# Altium PCB CME-M5_DevBrd.PcbDoc
Units mil, origin at the board's own origin, x right, y up, seen from the top; angles counter-clockwise.
Board outline 3741 x 2048 mil, 2 copper layers (Top Layer, Bottom Layer); 58 components, 120 nets, 399 pads, 181 vias.
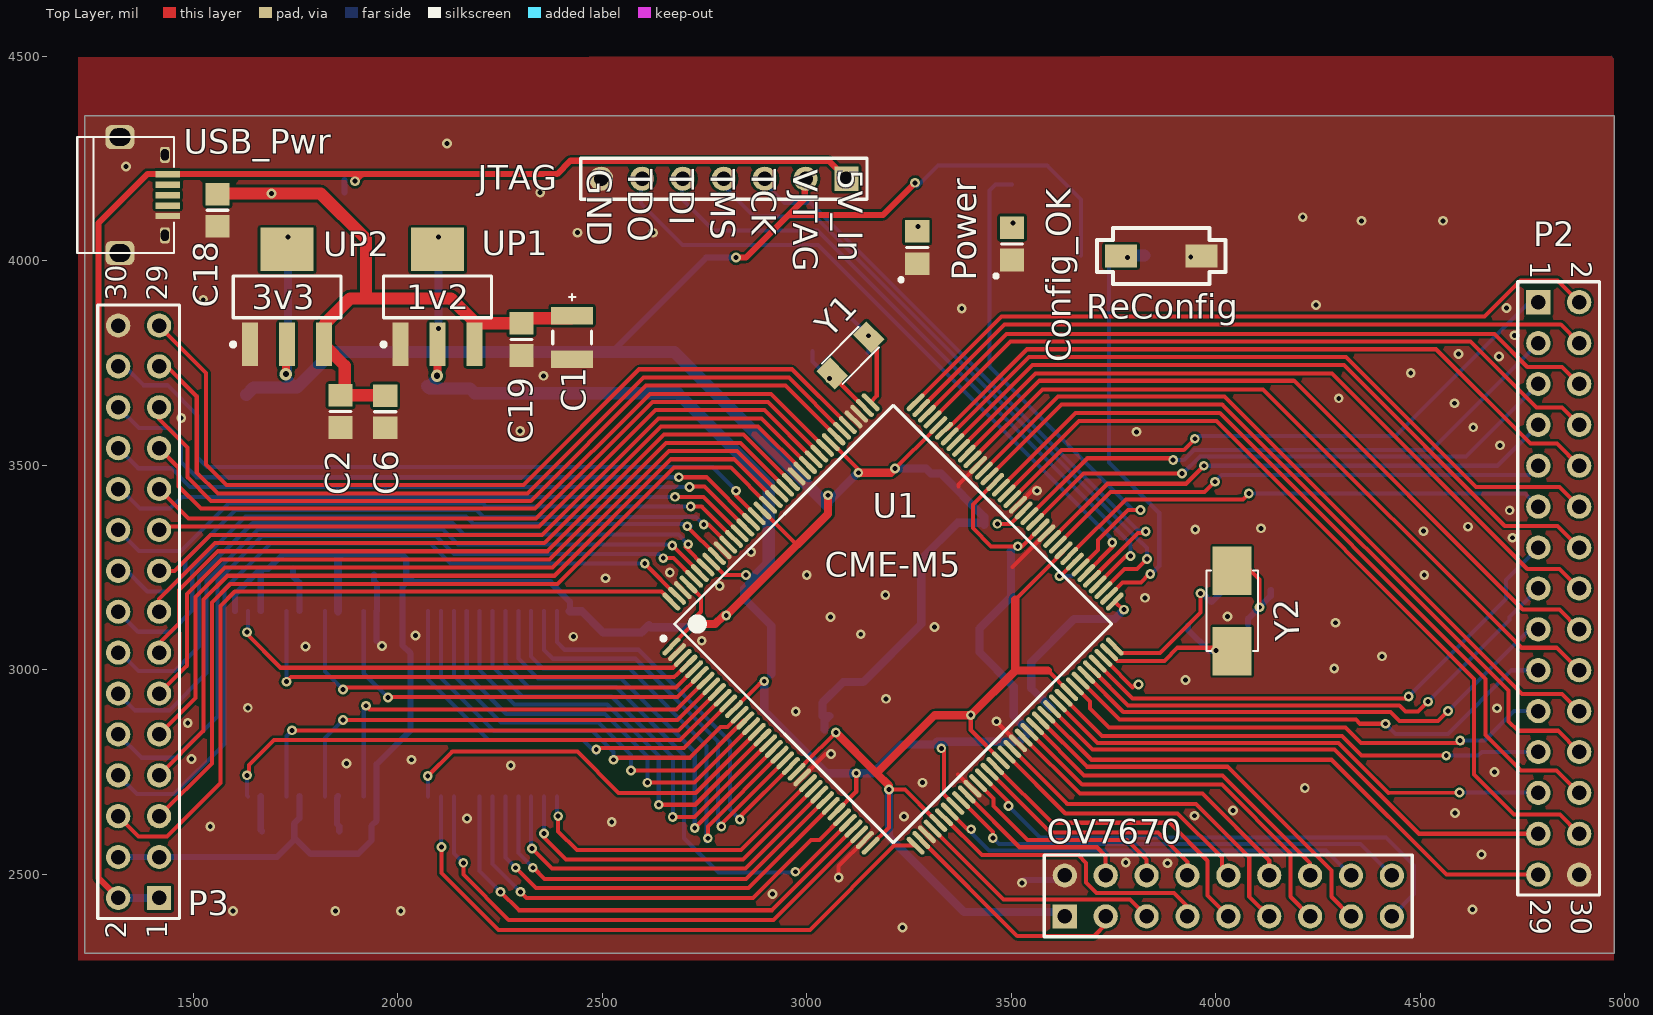
[diagram p0: Top Layer view]
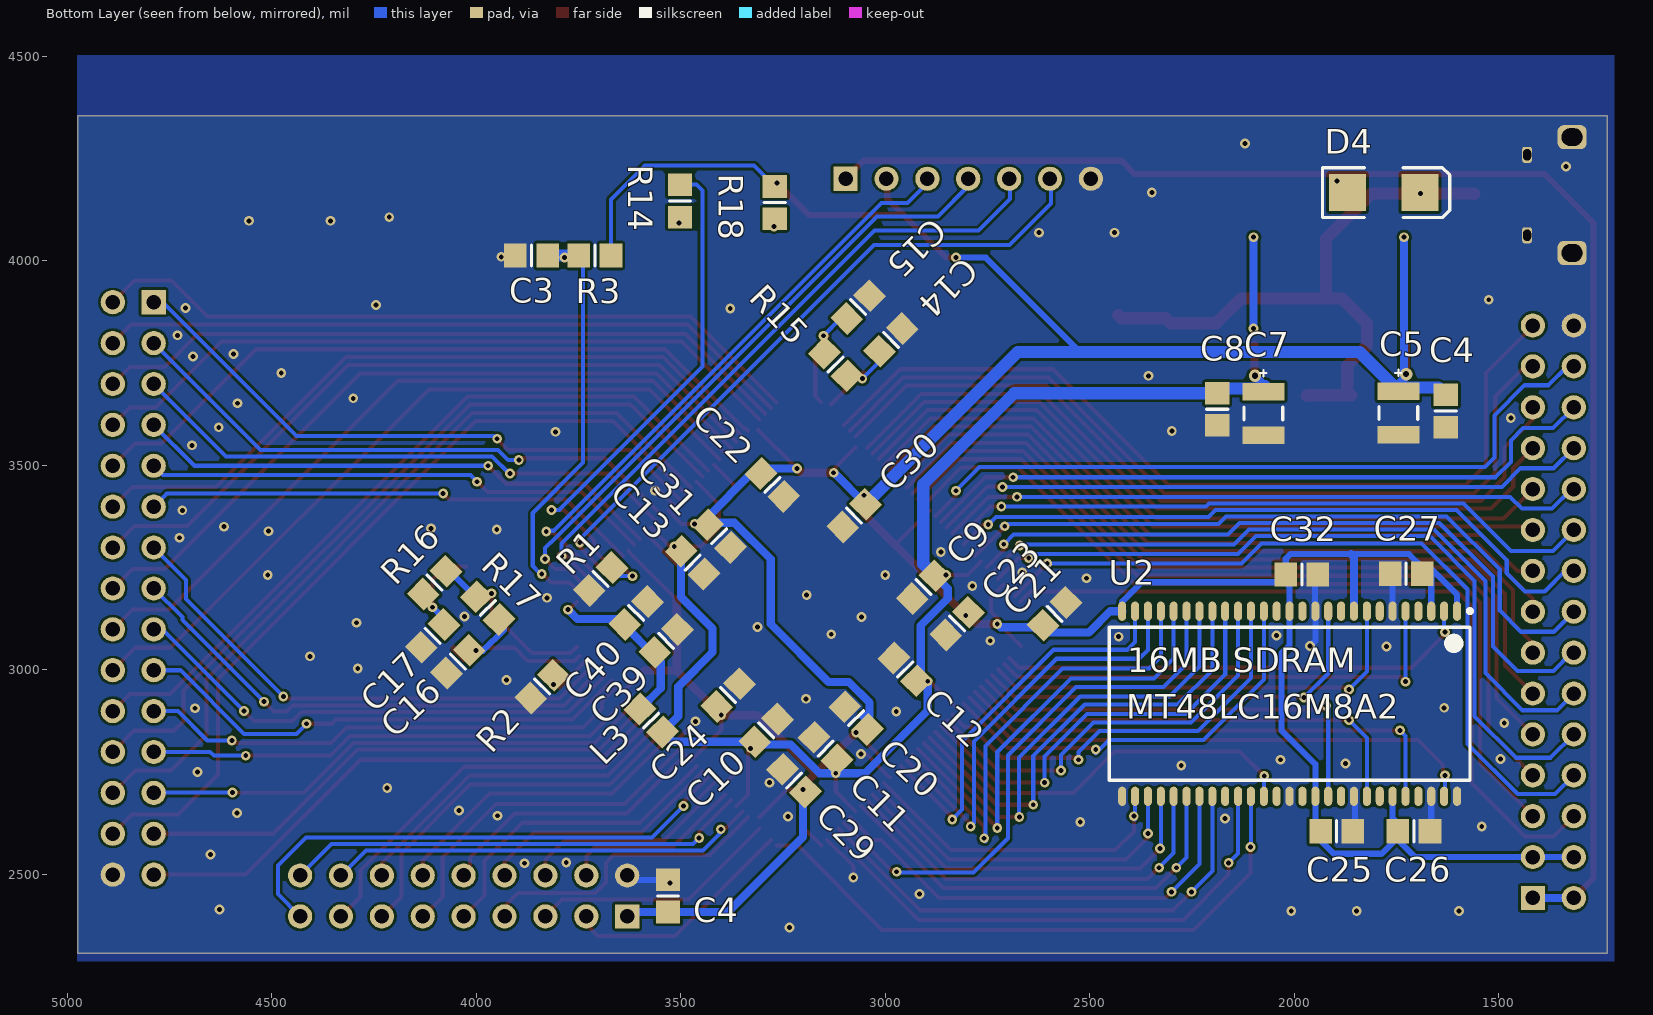
[diagram p1: Bottom Layer view, seen from below]

## Layer stack, top to bottom
Top Solder: solder mask 0.4, Solder Resist, Dk 3.5
Top Layer: signal copper 1.4
Dielectric 1: dielectric 12.6, FR-4, Dk 4.8
Bottom Layer: signal copper 1.4
Bottom Solder: solder mask 0.4, Solder Resist, Dk 3.5

## Board outline
1234,2307 1234,4355 4975,4355 4975,2307

## Design rules (kind name [scope] priority, off if disabled: settings)
Clearance [All] p1: gap=6 ignorepadtopadclearanceinfootprint=FALSE except(0: Arc-Hole Track-Hole SMDPad-Hole THPad-Hole Via-Hole Fill-Hole Poly-Hole Region-Hole Text-Hole)
HoleToHoleClearance [All] p1: gap=0 allowstackedmicrovias=TRUE
MinimumSolderMaskSliver [All] p1: minsoldermaskwidth=0
PolygonConnect [All] p1: connectstyle=Direct reliefconductorwidth=10 reliefentries=4 polygonreliefangle="90 Angle" airgapwidth=10
RoutingVias [All] p1: holewidth=28 width=50 viastyle="Through Hole" minholewidth=28 minwidth=50 maxholewidth=28 maxwidth=50
SilkToSilkClearance [All] p1: silktosilkclearance=0
SilkToSolderMaskClearance [IsPad] p1: minsilkscreentomaskgap=0 clearancetoexposedcopper=TRUE
SolderMaskExpansion [All] p1: expansion=4
Width [All] p1: maxlimit=50 minlimit=10 preferedwidth=10
26 further rules are at their usual default settings.

## Classes and differential pairs
component class CME-M5_DevBrd: C4 OV7670 P2 P3 R1 U1 U2
component class Block_Pwr&Dbg: C1 C2 C3 C4 C5 C6 C7 C8 C9 C10 C11 C12 C13 C14 C15 C16 C17 C18 C19 C20 C21 C22 C23 C24 C25 C26 C27 C29 C30 C31 C32 C39 C40 Config_OK D4 JTAG L3 Power R2 R3 R14 R15 R16 R17 R18 ReConfig UP1 UP2 USB_Pwr Y1 Y2

## Components (designator, comment, footprint, x,y, rotation, side; value= is the part's Value field where it differs from the comment)
C1 "Cap Pol3" TanCap-1210 2426,3813 r270 top value=47uF
C2 "Cap" 6-0805_M 1860,3632 r90 top value=100nF
C3 "Cap" 6-0805_M 3865,4013.26 r180 bottom value=1uF
C4 "Cap" 6-0805_M 1629,3633 r90 bottom value=100nF
C4 "Cap" 6-0805_M 3531,2447 r270 bottom value=100nF
C5 "Cap Pol3" TanCap-1210 1745,3628 r270 bottom value=47uF
C6 "Cap" 6-0805_M 1969,3631 r90 top value=100nF
C7 "Cap Pol3" TanCap-1210 2075,3627 r270 bottom value=47uF
C8 "Cap" 6-0805_M 2188,3637 r90 bottom value=100nF
C9 "Cap" 6-0805_M 2906,3202 r135 bottom value=100nF
C10 "Cap" 6-0805_M 3291,2852 r315 bottom value=100nF
C11 "Cap" 6-0805_M 3146,2807 r225 bottom value=100nF
C12 "Cap" 6-0805_M 2951,3001 r225 bottom value=100nF
C13 "Cap" 6-0805_M 3471,3262 r45 bottom value=100nF
C14 "Cap" 6-0805_M 2986,3807 r315 bottom value=15pF
C15 "Cap" 6-0805_M 3066,3887 r315 bottom value=15pF
C16 "Cap" 6-0805_M 4045,3020 r135 bottom value=22pF
C17 "Cap" 6-0805_M 4107,3083 r135 bottom value=22pF
C18 "Cap" 6-0805_M 1559,4124 r90 top value=10uF
C19 "Cap" 6-0805_M 2302,3808 r90 top value=10uF
C20 "Cap" 6-0805_M 3071,2882 r225 bottom value=100nF
C21 "Cap" 6-0805_M 2586,3137.04 r315 bottom value=100nF
C22 "Cap" 6-0805_M 3276,3452 r45 bottom value=100nF
C23 "Cap" 6-0805_M 2824,3113 r135 bottom value=100nF
C24 "Cap" 6-0805_M 3384,2938 r315 bottom value=100nF
C25 "Cap" 6-0805_M 1896,2605 r0 bottom value=100nF
C26 "Cap" 6-0805_M 1707,2605 r0 bottom value=100nF
C27 "Cap" 6-0805_M 1726,3235 r180 bottom value=100nF
C29 "Cap" 6-0805_M 3223,2729 r225 bottom value=10uF
C30 "Cap" 6-0805_M 3076,3377 r135 bottom value=10uF
C31 "Cap" 6-0805_M 3406,3327 r45 bottom value=10uF
C32 "Cap" 6-0805_M 1981,3233 r0 bottom value=10uF
C39 "Cap" 6-0805_M 3536,3071 r315 bottom value=100nF
C40 "Cap" 6-0805_M 3609,3139 r315 bottom value=10uF
Config_OK "LED2" 6-0805_Diode 3502,4041.63 r270 top
D4 "SS34" SMB 1781,4167 r180 bottom
JTAG "P4" HDR1X7 3097,4201 r180 top
L3 "Inductor" 6-0805_M 3572.21,2876.07 r45 bottom value=300R@100M
OV7670 "OV7670" HDR2X9 3631,2397 r0 top
P2 "Header 15X2" HDR2X15 4789,3899 r270 top
P3 "Header 15X2" HDR2X15 1416,2442 r90 top locked
Power "LED2" 6-0805_Diode 3270,4032.63 r270 top
R1 "Res3" 6-0805_M 3696,3222 r135 bottom value=1K
R2 "Res3" 6-0805_M 3839,2959 r135 bottom value=1K
R3 "Res3" 6-0805_M 3710,4013.26 r180 bottom value=10k
R14 "Res1" 6-0805_M 3502,4146.63 r270 bottom value=330
R15 "Res3" 6-0805_M 3121,3747 r225 bottom value=15M
R16 "Res3" 6-0805_M 4102,3213 r315 bottom value=330
R17 "Res3" 6-0805_M 3972,3151 r45 bottom value=1M
R18 "Res1" 6-0805_M 3270,4142.63 r270 bottom value=330
ReConfig "S2" Switch_SMT-022S-H2.5 3867,4012 r0 top
U1 "CME-M5-QFP144" QFP144N-50P2200X2200X160 3211,3112 r45 top locked
U2 "MT48LC16M8A2" TSOP54-80P1180X100- 2011,2917 r270 bottom locked
UP1 "LM1117-1.2" SOT223_M 2097,3912 r90 top
UP2 "LM1117-3.3" SOT223_M 1729,3912 r90 top
USB_Pwr "Header 5" MicroUSB 1341.5,4173.35 r90 top
Y1 "32.768k" XTAL-3215 3107,3769 r225 top
Y2 "20M" XTAL-5032 4040,3144 r90 top

## Footprints (in the part's own frame and the unit in brackets; to place one, negate y for a bottom-side part, rotate by r counter-clockwise, add the part's x,y. Pads: shape width x height; smd on the part's side, far side on the other; paste and mask are expansions set on the pad)
6-0805_Diode [mm] "Chip Resistor, Body 2.0x1.2mm, IPC Low Density"
  rect 1.4x1.5 smd: 1(-1,0) 2(1,0)
  silkscreen extent 0,-1.1 2.1,0.65, body extent -1.07,-0.7 1.07,0.7, height 0.7
6-0805_M [mm] "Chip Resistor, Body 2.0x1.2mm, IPC Low Density"
  rect 1.4x1.5 smd: 1(-1,0) 2(1,0)
  silkscreen extent 0,-0.65 0,0.65, body extent -1.07,-0.7 1.07,0.7, height 0.7
HDR1X7 [mm] "Connector; Header; 7 Position"
  rect 1.5x1.5 hole 0.9: 1(0,0)
  round 1.5 hole 0.9: 2(2.54,0) 3(5.08,0) 4(7.62,0) 5(10.16,0) 6(12.7,0) 7(15.24,0)
  silkscreen extent -1.27,-1.27 16.51,1.27
HDR2X9 [mm] "Connector; Header; 9x2 Position"
  rect 1.5x1.5 hole 0.9: 1(0,0)
  round 1.5 hole 0.9: 2(0,2.54) 3(2.54,0) 4(2.54,2.54) 5(5.08,0) 6(5.08,2.54) 7(7.62,0) 8(7.62,2.54) 9(10.16,0) 10(10.16,2.54) 11(12.7,0) 12(12.7,2.54) 13(15.24,0) 14(15.24,2.54) 15(17.78,0) 16(17.78,2.54) 17(20.32,0) 18(20.32,2.54)
  silkscreen extent -1.27,-1.27 21.59,3.81
HDR2X15 [mm] "Connector; Header; 15x2 Position"
  rect 1.5x1.5 hole 0.9: 1(0,0)
  round 1.5 hole 0.9: 2(0,2.54) 3(2.54,0) 4(2.54,2.54) 5(5.08,0) 6(5.08,2.54) 7(7.62,0) 8(7.62,2.54) 9(10.16,0) 10(10.16,2.54) 11(12.7,0) 12(12.7,2.54) 13(15.24,0) 14(15.24,2.54) 15(17.78,0) 16(17.78,2.54) 17(20.32,0) 18(20.32,2.54) 19(22.86,0) 20(22.86,2.54) 21(25.4,0) 22(25.4,2.54) 23(27.94,0) 24(27.94,2.54) 25(30.48,0) 26(30.48,2.54) 27(33.02,0) 28(33.02,2.54) 29(35.56,0) 30(35.56,2.54)
  silkscreen extent -1.27,-1.27 36.83,3.81
MicroUSB [mm]
  round 0.635 on Top Overlay: 0(0.986,-3.776)
  rect 0.4x1.524 smd: 1(0.986,-2.426) 2(0.336,-2.426) 3(-0.314,-2.426) 4(-0.964,-2.426) 5(-1.614,-2.426)
  rrect50% 1.5x1.8 hole 1.1 slot 1.3 at 90 deg: 5(-3.911,0.543) 5(3.286,0.543)
  rrect50% 1x0.6 hole 0.5 slot 0.7 at 0 deg: 5(-2.812,-2.254) 5(2.188,-2.254)
  silkscreen extent -3.91,-2.81 3.29,3.19
QFP144N-50P2200X2200X160 [mm] "TSQFP, 144-Leads, Body 20.00x20.00mm, Pitch 0.50mm, IPC Medium Density"
  oval 1.45x0.3 smd: 1(-10.725,8.75) 2(-10.725,8.25) 3(-10.725,7.75) 4(-10.725,7.25) 5(-10.725,6.75) 6(-10.725,6.25) 7(-10.725,5.75) 8(-10.725,5.25) 9(-10.725,4.75) 10(-10.725,4.25) 11(-10.725,3.75) 12(-10.725,3.25) 13(-10.725,2.75) 14(-10.725,2.25) 15(-10.725,1.75) 16(-10.725,1.25) 17(-10.725,0.75) 18(-10.725,0.25) 19(-10.725,-0.25) 20(-10.725,-0.75) 21(-10.725,-1.25) 22(-10.725,-1.75) 23(-10.725,-2.25) 24(-10.725,-2.75) 25(-10.725,-3.25) 26(-10.725,-3.75) 27(-10.725,-4.25) 28(-10.725,-4.75) 29(-10.725,-5.25) 30(-10.725,-5.75) 31(-10.725,-6.25) 32(-10.725,-6.75) 33(-10.725,-7.25) 34(-10.725,-7.75) 35(-10.725,-8.25) 36(-10.725,-8.75) 73(10.725,-8.75) 74(10.725,-8.25) 75(10.725,-7.75) 76(10.725,-7.25) 77(10.725,-6.75) 78(10.725,-6.25) 79(10.725,-5.75) 80(10.725,-5.25) 81(10.725,-4.75) 82(10.725,-4.25) 83(10.725,-3.75) 84(10.725,-3.25) 85(10.725,-2.75) 86(10.725,-2.25) 87(10.725,-1.75) 88(10.725,-1.25) 89(10.725,-0.75) 90(10.725,-0.25) 91(10.725,0.25) 92(10.725,0.75) 93(10.725,1.25) 94(10.725,1.75) 95(10.725,2.25) 96(10.725,2.75) 97(10.725,3.25) 98(10.725,3.75) 99(10.725,4.25) 100(10.725,4.75) 101(10.725,5.25) 102(10.725,5.75) 103(10.725,6.25) 104(10.725,6.75) 105(10.725,7.25) 106(10.725,7.75) 107(10.725,8.25) 108(10.725,8.75)
  oval 0.3x1.45 smd: 37(-8.75,-10.725) 38(-8.25,-10.725) 39(-7.75,-10.725) 40(-7.25,-10.725) 41(-6.75,-10.725) 42(-6.25,-10.725) 43(-5.75,-10.725) 44(-5.25,-10.725) 45(-4.75,-10.725) 46(-4.25,-10.725) 47(-3.75,-10.725) 48(-3.25,-10.725) 49(-2.75,-10.725) 50(-2.25,-10.725) 51(-1.75,-10.725) 52(-1.25,-10.725) 53(-0.75,-10.725) 54(-0.25,-10.725) 55(0.25,-10.725) 56(0.75,-10.725) 57(1.25,-10.725) 58(1.75,-10.725) 59(2.25,-10.725) 60(2.75,-10.725) 61(3.25,-10.725) 62(3.75,-10.725) 63(4.25,-10.725) 64(4.75,-10.725) 65(5.25,-10.725) 66(5.75,-10.725) 67(6.25,-10.725) 68(6.75,-10.725) 69(7.25,-10.725) 70(7.75,-10.725) 71(8.25,-10.725) 72(8.75,-10.725) 109(8.75,10.725) 110(8.25,10.725) 111(7.75,10.725) 112(7.25,10.725) 113(6.75,10.725) 114(6.25,10.725) 115(5.75,10.725) 116(5.25,10.725) 117(4.75,10.725) 118(4.25,10.725) 119(3.75,10.725) 120(3.25,10.725) 121(2.75,10.725) 122(2.25,10.725) 123(1.75,10.725) 124(1.25,10.725) 125(0.75,10.725) 126(0.25,10.725) 127(-0.25,10.725) 128(-0.75,10.725) 129(-1.25,10.725) 130(-1.75,10.725) 131(-2.25,10.725) 132(-2.75,10.725) 133(-3.25,10.725) 134(-3.75,10.725) 135(-4.25,10.725) 136(-4.75,10.725) 137(-5.25,10.725) 138(-5.75,10.725) 139(-6.25,10.725) 140(-6.75,10.725) 141(-7.25,10.725) 142(-7.75,10.725) 143(-8.25,10.725) 144(-8.75,10.725)
  silkscreen extent -10.85,-9.6 9.6,9.6, body extent -10,-10 10,10, height 1.6
SMB [mm] "DO-214-AA/SMB; 2 C-Bend Leads; Body 5.3 x 3.6 mm, inc. leads (LxW)"
  rect 2.3x2.3 smd: 1(-2.25,0) 2(2.25,0)
  silkscreen extent -3.8,-1.55 4.1,1.55
SOT223_M [mm] "SOT223, 4-Leads, Body 6.5x3.5mm, Pitch 2.3mm, Lead Span 7mm, IPC Low Density"
  rect 2.7x1 smd: 1(-2.95,2.3) 2(-2.95,0) 3(-2.95,-2.3)
  rect 2.7x3.3 smd: 4(2.95,0)
  silkscreen extent -3.07,-3.35 1.3,3.47, body extent -1.85,-3.35 1.85,3.35, height 1.7
Switch_SMT-022S-H2.5 [mm]
  rect 2x1.4 smd: 1(2.5,0) 2(-2.5,0)
  silkscreen extent -4,-1.75 4,1.75
TanCap-1210 [mm] "Chip Capacitor, Body 3.2x2.5mm, IPC High Density"
  rect 1.1x2.6 smd: 1(-1.35,0) 2(1.35,0)
  silkscreen extent -2.7,-1.2 0.4,1.2, body extent -1.68,-1.32 1.68,1.32, height 0.9
TSOP54-80P1180X100- [mm] "TSOP, 54-Leads, Body 22.22x10.16mm, Pitch 0.80mm, IPC Medium Density"
  oval 1.2x0.5 smd: 1(-5.75,10.4) 2(-5.75,9.6) 3(-5.75,8.8) 4(-5.75,8) 5(-5.75,7.2) 6(-5.75,6.4) 7(-5.75,5.6) 8(-5.75,4.8) 9(-5.75,4) 10(-5.75,3.2) 11(-5.75,2.4) 12(-5.75,1.6) 13(-5.75,0.8) 14(-5.75,0) 15(-5.75,-0.8) 16(-5.75,-1.6) 17(-5.75,-2.4) 18(-5.75,-3.2) 19(-5.75,-4) 20(-5.75,-4.8) 21(-5.75,-5.6) 22(-5.75,-6.4) 23(-5.75,-7.2) 24(-5.75,-8) 25(-5.75,-8.8) 26(-5.75,-9.6) 27(-5.75,-10.4) 28(5.75,-10.4) 29(5.75,-9.6) 30(5.75,-8.8) 31(5.75,-8) 32(5.75,-7.2) 33(5.75,-6.4) 34(5.75,-5.6) 35(5.75,-4.8) 36(5.75,-4) 37(5.75,-3.2) 38(5.75,-2.4) 39(5.75,-1.6) 40(5.75,-0.8) 41(5.75,0) 42(5.75,0.8) 43(5.75,1.6) 44(5.75,2.4) 45(5.75,3.2) 46(5.75,4) 47(5.75,4.8) 48(5.75,5.6) 49(5.75,6.4) 50(5.75,7.2) 51(5.75,8) 52(5.75,8.8) 53(5.75,9.6) 54(5.75,10.4)
  silkscreen extent -5.87,-11.2 4.75,11.32, body extent -5.15,-11.2 5.15,11.2, height 1
XTAL-3215 [mm]
  rect 1.2x1.6 smd: 1(-1.6,0) 2(1.6,0)
  silkscreen extent -1.6,-0.9 1.6,0.9
XTAL-5032 [mm]
  rect 3x2.4 smd: 1(-2.5,0) 2(2.5,0)
  silkscreen extent -2.5,-1.6 2.5,1.6

## Part data
C1 C5 C7: "Polarized Capacitor (Surface Mount)", LatestRevisionDate=29-May-2009, LatestRevisionNote="IPC-7351 Footprint Added.", PackageDescription="Chip Capacitor", PackageReference=C0805, Published=8-Jun-2000, Publisher="Altium Limited"
C2 C3 C4 C4 C6 C8 C9 C10 C11 C12 C13 C14 C15 C16 C17 C18 C19 C20 C21 C22 C23 C24 C25 C26 C27 C29 C30 C31 C32 C39 C40: "Capacitor", LatestRevisionDate=17-Jul-2002, LatestRevisionNote="Re-released for DXP Platform.", PackageDescription="Radial Cap, Thru-Hole; 2 Leads; 0.3 in Pin Spacing", PackageReference=RAD-0.3, Published=8-Jun-2000, Publisher="Altium Limited"
Config_OK Power: "Typical RED, GREEN, YELLOW, AMBER GaAs LED", LatestRevisionDate=17-Jul-2002, LatestRevisionNote="Re-released for DXP Platform.", PackageDescription="SM LED; 2 Flat Leads", PackageReference=3.2X1.6X1.1, PackageVersion=Feb-2002, Published=8-Jun-2000, Publisher="Altium Limited"
D4: library part "D Schottky", "Schottky Diode", Code_JEDEC=DO-214-AA, LatestRevisionDate=17-Jul-2002, LatestRevisionNote="Re-released for DXP Platform.", PackageDescription="DO-214-AA/SMB; 2 C-Bend Leads; Body 5.3 x 3.6 mm, inc. leads (LxW)", PackageReference=SMB, Published=8-Jun-2000, Publisher="Altium Limited"
JTAG: library part "Header 7", "Header, 7-Pin", LatestRevisionDate=17-Jul-2002, LatestRevisionNote="Re-released for DXP Platform.", Publisher="Altium Limited"
OV7670: library part "Header 9X2", "Header, 9-Pin, Dual row", LatestRevisionDate=17-Jul-2002, LatestRevisionNote="Re-released for DXP Platform.", Publisher="Altium Limited"
P2 P3: "Header, 15-Pin, Dual row", LatestRevisionDate=17-Jul-2002, LatestRevisionNote="Re-released for DXP Platform.", Publisher="Altium Limited"
R1 R2 R3 R14 R15 R16 R17 R18: "Resistor", Published=8-Jun-2000, Publisher="Altium Limited"
  R1 R2 R3 R15 R16 R17: LatestRevisionDate=29-May-2009, LatestRevisionNote="IPC-7351 Footprint Added.", PackageDescription="Chip Resistor", PackageReference=J1-0603
  R14 R18: LatestRevisionDate=17-Jul-2002, LatestRevisionNote="Re-released for DXP Platform.", PackageDescription="Axial Device, Thru-Hole; 2 Leads; 0.3 in Pin Spacing", PackageReference=AXIAL-0.3
ReConfig: library part SW-PB, "Switch", LatestRevisionDate=17-Jul-2002, LatestRevisionNote="Re-released for DXP Platform.", PackageDescription="Switch; 2 Leads", PackageReference=SPST-2, Published=24-Mar-1999, Publisher="Altium Limited"
U2: library part SDRAM-8
UP1 UP2: library part LM1117
USB_Pwr: "Header, 5-Pin", LatestRevisionDate=17-Jul-2002, LatestRevisionNote="Re-released for DXP Platform.", Publisher="Altium Limited"
Y1 Y2: library part XTAL, "Crystal Oscillator", LatestRevisionDate=17-Jul-2002, LatestRevisionNote="Re-released for DXP Platform.", PackageDescription="Crystal, Thru-Hole; 2 Leads; Body 3.1 x 8.2 mm (Dia.xH)", PackageReference=R38, Published=8-Jun-2000, Publisher="Altium Limited"
L3: Code_IEC=1005, Code_JEITA=0402, LatestRevisionDate=29-May-2009, LatestRevisionNote="IPC-7351 Footprint Added.", PackageDescription="Chip Inductor", PackageReference=0402-A, Published=8-Jun-2000, Publisher="Altium Limited"

## Via types
v1: diameter 24, hole 12, Top Layer to Bottom Layer, 179 vias
v2: diameter 30, hole 15, Top Layer to Bottom Layer, 2 vias

## Nets (pads, with @x,y where several pads share a name; then routed paths per layer and width w, separated by ;. In a path a pad name is that pad's centre, name@x,y a point inside that pad or via, vN(x,y) a via of type N, cw(c..) or ccw(c..) an arc to the next point about the centre after c; other vN are vias at no path point)
1V1: C7.1 C8.2 C9.2 C10.2 C11.2 C12.2 C13.2 L3.1 U1.12 U1.30 U1.44 U1.86 U1.94 U1.137 UP1.2 UP1.4 | length 3946.4
  Top Layer w10: U1.137 2798.69,3232 v1(2851,3232) ; U1.12 2885.05,2967 2891,2967 v1(2896,2972) ; U1.30 3121,2701.85 v1(3121,2747) ; v1(3329,2808) 3336,2801 3336,2694.69 U1.44 ; U1.94 3406,3404.44 3406,3347 3451,3302 v1(3516,3302) 3526.27,3302 U1.86
  Top Layer w20: v2(2095.85,3719) 2095.85,3728.85 2097,3730 UP1.2
  Bottom Layer w20: C7.1@2071,3694.15 v2(2095.85,3719) ; v1(2099,3835) v1(2099,4058) ; C9.2 2847,3198.68 2847,3174 2913.16,3107.84 C12.2@2913.16,2989.16 ; v1(2896,2972) 2896,2900 3049,2747 v1(3121,2747) 3161,2747 3231,2817 3311.68,2817 C10.2 3520.3,2824.16 L3.1 3506,2886.6 3506,2959 3422,3043 3422,3101 3499.53,3178.53 3499.53,3289.15 C13.2
  Bottom Layer w30: C7.1@2071,3694.15 2077.15,3688 2176.37,3688 C8.2 2684.63,3676.37 2907,3454 2907,3258.68 C9.2
1V1A: C39.2 C40.2 L3.2 U1.73 | length 446.3
  Top Layer w10: U1.73@3754.02,3166.12 3773.14,3147 v1(3776,3147)
  Bottom Layer w20: L3.2 3549,2954.95 3549,3019.32 3653.84,3124.16 3753.16,3124.16 v1(3776,3147)
3V3: C4.2 C5.1 C20.2 C21.2 C22.2 C23.2 C24.2 C25.2 C26.2 C27.2 C29.2 C30.2 C31.2 C32.2 JTAG.2 OV7670.1 P3.3 P3.4 R3.2 R18.1 U1.1 U1.23 U1.36 U1.41 U1.52 U1.64 U1.82 U1.89 U1.104 U1.116 U1.128 U1.141 U2.1 U2.3 U2.9 U2.14 U2.27 U2.43 U2.49 UP2.2 UP2.4 | length 11382
  Top Layer w10: U1.1@2667.98,3057.88 2722.09,3112 v1(2726,3112) 2726,3127 2741,3142 2741,3178.34 U1.141 ; U1.128 2976.12,3305.12 ; 2996.14,2771.86 v1(3071,2846.73) ; U1.116@3072.15,3543.15 3126,3489.31 v1(3126,3482) ; U1.36 3201,2614.82 v1(3201,2707) 3240.18,2707 U1.41@3308.09,2639.09 ; v1(3216,3492) U1.104@3311,3587 ; v1(3401,2889) 3401,2852.4 U1.52 ; v1(3466,3357) 3497.76,3357 U1.89 ; 3510,3172 3627.89,3289.89 U1.82 ; 3589.47,2998 U1.64
  Top Layer w15: v1(2827,4008) 2851,4008 2955,4112 ; JTAG.2@2995,4201 2995,4152 2955,4112 ; v1(3265,4191) 3186,4112 2955,4112
  Top Layer w20: v2(1726,3723) 1726,3792.86 UP2.2 ; v1(2726,3112) 2776,3112 2796,3132 v1(2803,3133) 2973,3303 ; 2976.12,3305.12 3052,3381 v1(3052,3427) ; v1(3071,2846.73) 3071,2847 3171,2747 ; v1(3126,3482) 3206,3482 v1(3216,3492) ; v1(3201,2707) 3201,2717 3171,2747 ; 3510,3172 3510,2998 ; 3589.47,2998 3510,2998 ; 3171,2747 3313,2889 v1(3401,2889) 3510,2998
  Bottom Layer w10: R18.1 3321,4233 3588,4233 3670.63,4150.37 R3.2 ; OV7670.1@3620.37,2407.63 OV7670.1
  Bottom Layer w15: P3.4 P3.3 1704,2542 1746.37,2584.37 C26.2@1746.37,2589.63 ; U2.1 1601.55,3183.92 C27.2@1664.63,3247 ; U2.3 1664.63,3143.46 C27.2@1664.63,3247 ; U2.49 1759.03,2637.03 1746.37,2624.37 C26.2 C26.2@1746.37,2589.63 ; U2.27 2420.45,3166.55 2373,3214 2039.37,3214 C32.2 ; 2523,3777 2754,4008 v1(2827,4008) ; C27.2@1664.63,3247 1683,3247 1719,3283 1861,3283 2009,3283 2020.37,3271.63 C32.2 ; C26.2@1746.37,2589.63 1786,2550 1903,2550 1935.37,2582.37 C25.2 1935.37,2618.37 1948.01,2631.01 U2.43 1948.01,2769.01 2031,2852 2031,3040 2011,3060 U2.14 2011,3203 2020.37,3212.37 C32.2
  Bottom Layer w20: v1(1731,4058) 1731,3728 v2(1726,3723) 1720.15,3723 C5.1@1753,3690.15 ; U2.9 1853.52,3275.52 1861,3283 ; U2.27 2449.62,3143.38 2502,3091 2595.64,3091 C21.2 ; C21.2@2618.84,3104.16 2718.16,3104.16 v1(2726,3112) ; C20.2 3043.16,2875.16 3054.71,2886.71 3038.47,2886.71 3038.47,2919.52 3089.16,2970.21 3138.21,2970.21 3280,3112 3280,3271.04 3368.48,3359.53 C31.2@3433.84,3359.53 ; C30.2 v1@3125.66,3482.34 ; v1(3201,2707) 3201,2591 3384.37,2407.63 3531,2407.63 OV7670.1@3620.37,2407.63 ; v1(3216,3492) 3291.68,3492 C22.2 3328.16,3479.84 3433.84,3374.16 C31.2@3433.84,3359.53 ; C31.2 C31.2@3433.84,3359.53
  Bottom Layer w30: C4.2@1629,3672.37 1646.78,3690.15 1753,3690.15 1839.85,3777 2523,3777 2676,3777 C30.2
5V: C1.1 C2.2 C6.2 C18.2 C19.2 D4.2 UP1.3 UP2.3 | length 1531.7
  Top Layer w30: C18.2 1560.63,4165 v1(1691,4165) 1811,4165 1922,4054 1922,3908 ; C6.2 1968,3671.37 C2.2 1870,3681.37 1870,3743.41 1821.55,3791.86 1821.55,3846.55 1883,3908 1922,3908 ; C1.1@2430,3867.15 2422.85,3860 2314.63,3860 C19.2 2190.63,3847.37 2130,3908 1922,3908
5V_IN: D4.1 JTAG.1 P3.1 P3.2 USB_Pwr.1 | length 3733.4
  Top Layer w15: P3.2 1268,2490 1268,4093 1387.18,4212.18 USB_Pwr.1 2389.18,4212.18 2421.83,4244.83 3053.17,4244.83 JTAG.1 ; v1(1895,4195) 1910.5,4210.5
  Bottom Layer w15: D4.1 D4.1@1869.58,4197.58
  Bottom Layer w20: P3.2 P3.1
FIFO-OE: OV7670.7 U1.42 | length 738
  Top Layer w10: U1.42 3428.01,2547 3664,2547 3683,2528 3683,2480 3709,2454 3898,2454 3931,2421 OV7670.7
FIFO-RCLK: OV7670.16 U1.43 | length 1053.8
  Top Layer w10: U1.43 3392.85,2610 v1(3402,2610)
  Bottom Layer w10: v1@3404,2612 v1(3402,2610) 3402,2602 3446,2558 4270,2558 OV7670.16
FIFO-RRST: OV7670.5 U1.40 | length 612.1
  Top Layer w10: U1.40 3481.34,2438 3790,2438 OV7670.5
FIFO-WEN: OV7670.18 U1.45 | length 1138.5
  Top Layer w10: U1.45 3455,2603.53 v1(3455,2589)
  Bottom Layer w10: v1(3455,2589) 3470,2574 4354,2574 OV7670.18
FIFO-WRST: OV7670.3 U1.38 | length 579.9
  Top Layer w10: U1.38 3514.66,2349 3703,2349 3731,2377 OV7670.3
GND: C1.2 C2.1 C3.1 C4.1 C5.2 C6.1 C7.2 C8.1 C9.1 C10.1 C11.1 C12.1 C13.1 C14.1 C15.1 C16.1 C17.1 C18.1 C19.1 C20.1 C21.1 C22.1 C23.1 C24.1 C25.1 C26.1 C27.1 C29.1 C30.1 C31.1 C32.1 C39.1 C40.1 Config_OK.2 JTAG.7 OV7670.2 P2.30 P3.30 Power.2 R1.1 R2.1 ReConfig.1 U1.2 U1.24 U1.35 U1.39 U1.47 U1.55 U1.85 U1.90 U1.97 U1.111 U1.112 U1.122 U1.135 U1.142 U2.6 U2.12 U2.28 U2.41 U2.46 U2.52 U2.54 UP1.1 UP2.1 USB_Pwr.5 | length 1163
  Top Layer w10: U1.24 3046.11,2794 v1(3059,2794) ; v1(3078,2492) 3078,2519.66 U1.35 ; 3370.21,2744 U1.47 ; 3371,3449 3371,3452.95 U1.97 ; v1(3464,2874) 3464,2872.92 U1.55 ; 3503,3251 3503.11,3251 U1.85 ; U1.90 3559.92,3447 v1@3561,3447
  Bottom Layer w15: U2.52 1664.54,2608.09 C26.1 ; C27.1@1743.37,3247 1743.37,3228.63 1759.03,3212.97 U2.6 ; U2.46 1851,2688.1 1851,2623 1856.63,2617.37 C25.1 ; C32.1 1941.63,3216.37 1949,3209 1949,3144.37 U2.12 1948.01,3070.99 v1(1961,3058) ; C4.1@3531,2486.37 3620.37,2486.37 OV7670.2
  other v1: 3234,2370 1597,2410 1847,2410 2007,2410 4628,2414 2916,2452 3526,2479 3882,2527 3780,2529 4650,2548 1541,2617 2523,2628 2169,2636 3238,2641 3948,2643 4585,2650 4042,2656 4218,2711 3283,2724 4682,2750 2276,2766 1874,2771 2033,2780 1495,2782 1486,2870 2973,2898 4688,2906 1633,2907 3194,2929 3926,2975 4290,3003 4407,3033 1774,3057 2743,3071 2429,3081 2043,3084 3132,3087 3312,3105 4293,3115 3058,3129 4029,3130 3827,3176 3192,3183 2787,3205 2508,3224 3000,3232 4510,3232 2665,3238 2864,3288 4726,3323 4508,3339 3950,3343 4111,3346 4617,3350 4719,3390 3563,3438 4695,3549 3806,3582 2299,3584 4630,3593 1470,3616 4584,3652 4301,3664 2356,3719 4477,3726 4693,3766 4594,3772 4731,3818 3379,3884 4711,3885 4245,3892 1524,3905 3939,4010 2439,4069 2624,4069 4357,4098 4556,4098 4213,4107 2348,4167 1335,4231 2120,4287
IO_1: U1.3 U2.2 | length 1165.4
  Top Layer w10: v1@1628.5,3089.5 1713,3005 2672.5,3005 U1.3
  Bottom Layer w10: v1(1631,3092) 1633.05,3094.05 U2.2
IO_2: U1.4 U2.5 | length 1171.7
  Top Layer w10: v1(1727.54,2971) 1738.54,2982 2675.49,2982 2682.49,2989 2683.06,2989 U1.4@2708.75,3014.69
  Bottom Layer w10: v1(1727.54,2971) U2.5
IO_3: U1.5 U2.8 | length 1086.5
  Top Layer w10: v1@1866,2957 2680.18,2957 U1.5
  Bottom Layer w10: U2.8 1822.02,2995.98 v1(1866,2952)
IO_4: U1.6 U2.11 | length 1012.4
  Top Layer w10: v1@1985,2932 1986,2933 2684.01,2933 U1.6
  Bottom Layer w10: U2.11 1916.51,2991.49 v1(1976,2932)
IO_5: U1.7 U2.44 | length 1086.9
  Top Layer w10: v1(1922,2912) 1931,2903 2681.85,2903 U1.7
  Bottom Layer w10: U2.44 1916.51,2906.51 v1(1922,2912)
IO_6: U1.8 U2.47 | length 1139.1
  Top Layer w10: v1(1866,2877) 2683.69,2877 U1.8
  Bottom Layer w10: U2.47 1822.02,2833.02 v1(1866,2877)
IO_7: U1.9 U2.50 | length 1244.9
  Top Layer w10: v1(1741,2852) 2686.53,2852 U1.9
  Bottom Layer w10: U2.50 1727.54,2838.54 v1(1741,2852)
IO_8: U1.10 U2.53 | length 1305.6
  Top Layer w10: v1(1631,2742) 1636,2747 1636,2767 1697,2828 2690.37,2828 U1.10
  Bottom Layer w10: v1(1631,2742) 1631,2692.67 U2.53
IO_9: U1.11 U2.16 | length 1031.7
  Top Layer w10: v1(2485,2805) 2489,2809 2699.21,2809 U1.11
  Bottom Layer w10: U2.16 2073.99,2976.01 2222,2828 2453,2828 2485,2796 v1(2485,2805)
IO_10: U1.13 U2.17 | length 1039.8
  Top Layer w10: v1(2527,2780) 2532,2785 2714,2785 2789,2860 2805.89,2860 U1.13
  Bottom Layer w10: U2.17 2105.49,2979.51 2235,2850 2476.37,2850 2527,2799.37 v1(2527,2780) v1@2527,2786
IO_11: U1.14 U2.18 | length 1039.1
  Top Layer w10: v1(2570,2754) 2723.79,2754 2845.86,2876.07 U1.14
  Bottom Layer w10: U2.18 2136.98,2986.02 2252,2871 2491,2871 2570,2792 v1(2570,2754)
IO_12: U1.15 U2.19 | length 1054.4
  Top Layer w10: v1(2610,2724) 2725.56,2724 U1.15
  Bottom Layer w10: U2.19 2168.48,2988.52 2265,2892 2506,2892 2610,2788 v1(2610,2724)
IO_13: U1.16 U2.39 | length 981.5
  Top Layer w10: v1(2073,2740) 2133,2800 2439,2800 2540,2699 2728.4,2699 U1.16
  Bottom Layer w10: U2.39 v1@2073.99,2739.01
IO_14: U1.17 U2.20 | length 1111.4
  Top Layer w10: v1(2638,2670) 2727.24,2670 U1.17
  Bottom Layer w10: U2.20 2199.98,3000.02 2285,2915 2512,2915 2638,2789 v1@2638,2668
IO_15: U1.18 U2.21 | length 1119.2
  Top Layer w10: v1(2672,2640) 2725.08,2640 U1.18
  Bottom Layer w10: U2.21 2231.47,3008.53 2305,2935 2523,2935 2673,2785 v1@2673,2643
IO_16: U1.19 U2.23 | length 1101.6
  Top Layer w10: v1(2726,2613) 2919.39,2806.39 U1.19
  Bottom Layer w10: U2.23 2294.46,3027.54 2343,2979 2546,2979 2726,2799 v1(2726,2613)
IO_17: U1.20 U2.24 | length 1146.9
  Top Layer w10: v1(2758,2588) 2758,2617.24 U1.20
  Bottom Layer w10: U2.24 2325.96,3032.04 2355,3003 2566,3003 2755,2814 v1@2755,2580 ; v1@2758,2583 v1(2758,2588)
IO_18: U1.21 U2.25 | length 1050.6
  Top Layer w10: v1(2791,2617) 2791,2622.4 U1.21
  Bottom Layer w10: U2.25 2357.46,3048.54 2379,3027 2581,3027 2783,2825 2783,2625 v1(2791,2617)
IO_19: U1.22 U2.26 | length 982.5
  Top Layer w10: v1(2836,2634) 2836,2639.56 U1.22
  Bottom Layer w10: U2.26 2388.95,3068.05 2408,3049 2588,3049 2812,2825 2812,2658 v1(2836,2634)
IO_20: U1.25 U2.29 | length 800.7
  Top Layer w10: v1(2392,2642) 2392,2605 2438,2559 2838.95,2559 U1.25
  Bottom Layer w10: U2.29 2388.95,2634.05 2392,2637.09 v1(2392,2642)
IO_21: U1.26 U2.30 | length 854.5
  Top Layer w10: v1(2357,2600) 2357,2590 2411,2536 2843.79,2536 U1.26
  Bottom Layer w10: v1@2357.46,2600 U2.30
IO_22: U1.27 U2.31 | length 926.5
  Top Layer w10: v1(2328,2563) 2377,2514 2849.63,2514 U1.27
  Bottom Layer w10: U2.31 2325.96,2565.04 v1(2328,2563)
IO_23: U1.28 U2.32 | length 995.6
  Top Layer w10: v1(2330,2516) 2331,2516 2359,2488 2851.47,2488 U1.28
  Bottom Layer w10: U2.32 2294.46,2551.54 v1(2330,2516)
IO_24: U1.29 U2.33 | length 1059.7
  Top Layer w10: v1(2288,2516) 2338,2466 2857.31,2466 U1.29
  Bottom Layer w10: U2.33 2262.97,2541.03 v1(2288,2516)
IO_25: U1.31 U2.34 | length 1136.4
  Top Layer w10: v1(2300,2457) 2315,2442 2868,2442 3010.01,2584.01 3031,2584.01 U1.31
  Bottom Layer w10: U2.34 2231.47,2525.53 v1(2300,2457)
IO_26: U1.32 U2.22 | length 1347.9
  Top Layer w10: v1(2972,2506) 2980.82,2506 U1.32
  Bottom Layer w10: U2.22 2262.97,3014.03 2319,2958 2533,2958 2700,2791 2700,2588 2784,2504 2965,2504 v1@2971,2510
IO_27: U1.33 U2.35 | length 1219.3
  Top Layer w10: v1(2251,2457) 2296,2412 2914.66,2412 U1.33
  Bottom Layer w10: U2.35 2199.98,2508.02 v1(2251,2457)
IO_28: U1.34 U2.37 | length 1302.2
  Top Layer w10: v1(2160,2528) 2160,2499 2271,2388 2918.5,2388 U1.34
  Bottom Layer w10: U2.37 2136.98,2551.02 v1(2160,2528)
IO_29: U1.37 U2.38 | length 1490.1
  Top Layer w10: v1(2107,2567) 2107,2503 2246,2364 3008,2364 3213.84,2569.84 U1.37
  Bottom Layer w10: U2.38 2105.49,2568.51 v1(2107,2567)
IO_35: OV7670.4 U1.46 | length 449.9
  Top Layer w10: U1.46 3520.37,2566 3710,2566 3731,2545 OV7670.4
IO_36: OV7670.6 U1.48 | length 538.9
  Top Layer w10: U1.48 3457,2685.05 3457,2667 3540,2584 3783,2584 3831,2536 OV7670.6
IO_37: OV7670.17 U1.49 | length 1294.6
  Top Layer w10: U1.49 3493,2676.89 v1(3493,2667)
  Bottom Layer w10: v1(3493,2667) 3570,2590 4417,2590 4485.5,2521.5 4485.5,2451.5 OV7670.17
IO_38: OV7670.8 U1.50 | length 608.5
  Top Layer w10: U1.50 3595.73,2602 3859,2602 3931,2530 OV7670.8
IO_39: OV7670.9 U1.51 | length 772.2
  Top Layer w10: U1.51 3599.56,2626 3887,2626 3980,2533 3980,2448 OV7670.9
IO_40: OV7670.10 U1.53 | length 681.1
  Top Layer w10: U1.53 3632.12,2649.12 ; 3632.12,2649 3907,2649 4015,2541 4015,2513 OV7670.10
IO_41: OV7670.11 U1.54 | length 854.2
  Top Layer w10: U1.54 3637.08,2672 3952,2672 4082,2542 4082,2446 OV7670.11
IO_42: OV7670.12 U1.56 | length 761.9
  Top Layer w10: U1.56 3667.76,2697 3968,2697 4131,2534 OV7670.12
IO_43: OV7670.13 U1.57 | length 935.6
  Top Layer w10: U1.57 3673.6,2719 4015,2719 4183,2551 4183,2445 OV7670.13
IO_44: OV7670.14 U1.58 | length 842.1
  Top Layer w10: U1.58 3678.44,2742 4017,2742 4231,2528 OV7670.14
IO_45: OV7670.15 U1.59 | length 994.7
  Top Layer w10: U1.59 3685.27,2763 4029,2763 4283,2509 4283,2445 OV7670.15
IO_46: P2.29 U1.60 | length 1364.8
  Top Layer w10: U1.60 3696.11,2780 4283,2780 4564,2499 P2.29
IO_47: P2.27 U1.61 | length 1315.2
  Top Layer w10: U1.61 3698.87,2805.08 4290.92,2805.08 4497,2599 P2.27
IO_48: P2.25 U1.62 | length 1269.1
  Top Layer w10: U1.62 3710.71,2821.08 4299.92,2821.08 4422.5,2698.5 4423,2699 v1(4596,2700)
  Bottom Layer w10: v1(4596,2700) P2.25@4792,2700
IO_49: P2.23 U1.63 | length 1223.6
  Top Layer w10: U1.63 3721.63,2838 4309,2838 4357,2790 v1(4564,2790)
  Bottom Layer w10: v1(4564,2790) 4642,2790 4651,2799 P2.23
IO_50: P2.21 U1.65 | length 1245.1
  Top Layer w10: U1.65 3693,2922.31 3693,2905 3739,2859 4317,2859 4355,2821 4604,2821 v1(4598,2827)
  Bottom Layer w10: v1(4598,2827) 4658,2827 4730,2899 P2.21
IO_51: P2.19 U1.66 | length 1245
  Top Layer w10: U1.66 3765.15,2878 4343,2878 4353,2868 v1(4415,2868) v1@4422,2868
  Bottom Layer w10: v1(4415,2868) 4440,2843 4568,2843 4724,2999 P2.19
IO_52: P2.17 U1.67 | length 1244.8
  Top Layer w10: U1.67 3773.99,2897 4428,2897 4450,2875 4544,2875 v1(4568,2899)
  Bottom Layer w10: v1(4568,2899) 4768,3099 P2.17
IO_53: P2.15 U1.68 | length 1263.1
  Top Layer w10: U1.68 3785.82,2913 4449,2913 4464,2898 4495,2898 v1(4519,2922)
  Bottom Layer w10: v1(4519,2922) 4718.75,3121.75 4718.75,3128.75 P2.15
IO_54: P2.13 U1.69 | length 1293.3
  Top Layer w10: U1.69 3796.66,2930 4467,2930 v1(4472,2935)
  Bottom Layer w10: v1(4472,2935) 4709.75,3172.75 4709.75,3219.75 P2.13
IO_57: P2.11 U1.81 | length 1223.7
  Top Layer w10: U1.81 3780.47,3417 4067,3417 v1(4081,3431)
  Bottom Layer w10: v1(4081,3431) 4757,3431 P2.11
IO_58: P2.9 U1.83 | length 1254.9
  Top Layer w10: U1.83 3742.79,3435 3973,3435 v1(3998,3460)
  Bottom Layer w10: v1(3998,3460) 4014,3476 4766,3476 P2.9
IO_59: P2.7 U1.84 | length 1304.5
  Top Layer w10: U1.84 3734.95,3455 3927,3455 v1(3971,3499)
  Bottom Layer w10: v1(3971,3499) 4689,3499 P2.7
IO_60: P2.5 U1.87 | length 1370.4
  Top Layer w10: U1.87 3676.44,3480 v1(3918,3480)
  Bottom Layer w10: v1(3918,3480) 3919.47,3480 3961.47,3522 4612,3522 P2.5
IO_61: P2.3 U1.88 | length 1423.6
  Top Layer w10: U1.88 3686,3517.4 3891.6,3517.4 v1(3896,3513)
  Bottom Layer w10: v1(3896,3513) 3922,3513 3947,3538 4528,3538 P2.3
IO_62: P2.1 U1.91 | length 1485.8
  Top Layer w10: U1.91 3623.08,3538 3922,3538 v1(3949,3565)
  Bottom Layer w10: v1(3949,3565) 3956,3572 4440,3572 4767,3899 P2.1
IO_63: P2.28 U1.92 | length 2028.5
  Top Layer w10: U1.92 3665.24,3608 4002,3608 4632,2978 4632,2744 4730,2646 4842,2646 P2.28
IO_64: P2.26 U1.93 | length 1954.9
  Top Layer w10: U1.93 3657.4,3628 4010,3628 4660,2978 4660,2841 4747,2754 4834,2754 P2.26
IO_65: P2.24 U1.95 | length 1910.9
  Top Layer w10: U1.95 3622.73,3649 4016,3649 4716,2949 4716,2874 4739,2851 4837,2851 P2.24
IO_66: P2.22 U1.96 | length 1849.4
  Top Layer w10: U1.96 3613.89,3668 4022,3668 4749,2941 4847,2941 P2.22
IO_67: P2.20 U1.98 | length 1839.2
  Top Layer w10: U1.98 3576.21,3686 4116,3686 4748,3054 4834,3054 P2.20
IO_68: P2.18 U1.99 | length 1823.4
  Top Layer w10: U1.99 3569.37,3707 4191,3707 4751,3147 4841,3147 P2.18
IO_69: P2.16 U1.100 | length 1805
  Top Layer w10: U1.100 3559.53,3725 4284,3725 4762,3247 4841,3247 P2.16
IO_70: P2.14 U1.101 | length 1788.3
  Top Layer w10: U1.101 3551.69,3745 4314,3745 4707,3352 4836,3352 P2.14
IO_71: P2.12 U1.102 | length 1771.6
  Top Layer w10: U1.102 3543.85,3765 4319,3765 4637,3447 4841,3447 P2.12
IO_72: P2.10 U1.103 | length 1754.1
  Top Layer w10: U1.103 3341.51,3590.49 3345.44,3590.49 3538.95,3784 4539,3784 4770,3553 4835,3553 P2.10
IO_73: P2.8 U1.105 | length 1744.7
  Top Layer w10: U1.105 3498.34,3803 4623,3803 4785,3641 4847,3641 P2.8
IO_74: P2.6 U1.106 | length 1726.4
  Top Layer w10: U1.106 3488.5,3821 4682,3821 4762,3741 4847,3741 P2.6
IO_75: P2.4 U1.107 | length 1712.1
  Top Layer w10: U1.107 3483.66,3844 4844,3844 P2.4
IO_76: P2.2 U1.108 | length 1768.3
  Top Layer w10: U1.108 3475.82,3864 4657,3864 4745,3952 4836,3952 P2.2
IO_77: P3.29 U1.113 | length 2150.5
  Top Layer w10: P3.29@1416,3841 1531,3726 1531,3502 1581,3452 2307,3452 2590,3735 2963.82,3735 U1.113
IO_78: P3.27 U1.114 | length 2079.9
  Top Layer w10: P3.27 1435,3742 1508,3669 1508,3483 1560,3431 2317,3431 2601,3715 2955.99,3715 U1.114
IO_79: P3.25 U1.115 | length 1979.4
  Top Layer w10: P3.25 1416,3613 1485,3544 1485,3471 1543,3413 2325,3413 2607,3695 2948.15,3695 U1.115
IO_80: P3.23 U1.117 | length 1888.1
  Top Layer w10: P3.23 1464,3494 1464,3448 1518,3394 2335.63,3394 2616.63,3675 2912.47,3675 U1.117
IO_81: P3.21 U1.118 | length 1814.9
  Top Layer w10: P3.21 1488,3370 2338,3370 2623,3655 2904.63,3655 U1.118
IO_82: P3.19 U1.119 | length 1771.9
  Top Layer w10: P3.19 1424,3350 2345,3350 2630,3635 2896.79,3635 U1.119
IO_83: P3.17 U1.120 | length 1788.6
  Top Layer w10: P3.17 1454,3242 1542,3330 2352,3330 2637,3615 2888.95,3615 U1.120
IO_84: P3.15 U1.121 | length 1823.5
  Top Layer w10: P3.15 1416,3173 1553,3310 2358,3310 2643,3595 2881.11,3595 U1.121
IO_85: P3.13 U1.123 | length 1874.8
  Top Layer w10: P3.13 1416,3064 1465,3113 1465,3195 1560,3290 2366,3290 2651,3575 2845.44,3575 U1.123
IO_86: P3.11 U1.124 | length 1933.1
  Top Layer w10: P3.11 1484,3010 1484,3185 1569,3270 2371,3270 2656,3555 2837.6,3555 U1.124
IO_87: P3.9 U1.125 | length 1991.9
  Top Layer w10: P3.9 1505,2931 1505,3178 1577,3250 2378,3250 2663,3535 2829.76,3535 U1.125
IO_88: P3.7 U1.126 | length 2052
  Top Layer w10: P3.7 1525,2851 1525,3172 1583,3230 2383,3230 2668,3515 2821.92,3515 U1.126
IO_89: P3.5 U1.127 | length 2111.4
  Top Layer w10: P3.5 1545,2771 1545,3165 1590,3210 2390,3210 2675,3495 2814.08,3495 U1.127
IO_90: P3.28 U1.129 | length 1780.7
  Top Layer w10: v1(2827,3438) 2827,3426 2877.23,3375.77 U1.129
  Bottom Layer w10: P3.28 1332,3742 1378,3696 1436,3696 1510,3622 1510,3519 1533,3496 2769,3496 v1(2827,3438)
IO_91: P3.26 U1.130 | length 1694.8
  Top Layer w10: v1(2687,3471) 2754.56,3471 U1.130
  Bottom Layer w10: P3.26 1367,3591 1440,3591 1470,3561 1470,3508 1507,3471 v1(2687,3471)
IO_92: P3.24 U1.131 | length 1614.6
  Top Layer w10: v1@2713,3448 2749.73,3448 U1.131
  Bottom Layer w10: P3.24 1365,3493 1446,3493 1492,3447 v1(2713,3447)
IO_93: P3.22 U1.132 | length 1588.6
  Top Layer w10: v1(2678,3423) 2746.89,3423 U1.132
  Bottom Layer w10: P3.22 1321,3442 1369,3394 1443,3394 1472,3423 v1(2678,3423)
IO_94: P3.20 U1.133 | length 1611.1
  Top Layer w10: v1(2716,3399) 2743.05,3399 U1.133
  Bottom Layer w10: P3.20 1367,3291 1470,3291 1586,3407 2208,3407 2216,3399 v1(2716,3399)
IO_95: P3.18 U1.134 | length 1648.5
  Top Layer w10: v1(2748,3355) 2759.21,3355 U1.134
  Bottom Layer w10: P3.18 1337,3242 1387,3192 1435,3192 1480,3237 1480,3268 1603,3391 2192,3391 2209,3374 2729,3374 v1(2748,3355)
IO_96: P3.16 U1.136 | length 1706.9
  Top Layer w10: v1(2707.53,3351) U1.136
  Bottom Layer w10: P3.16 1365,3093 1445,3093 1497,3145 1497,3245 1627,3375 2167,3375 2185,3357 v1@2707.53,3357 ; v1(2707.53,3351) v1@2717,3351
IO_97: P3.14 U1.138 | length 1754.2
  Top Layer w10: v1@2702.93,3299.93 U1.138
  Bottom Layer w10: P3.14 1321,3042 1366,2997 1454,2997 1514,3057 1514,3228 1645,3359 2134,3359 2162,3331 2686,3331 v1(2710,3307)
IO_98: P3.12 U1.139 | length 1798.4
  Top Layer w10: v1(2671.01,3304) U1.139
  Bottom Layer w10: P3.12 1357,2901 1441,2901 1532,2992 1532,3217 1658,3343 2110,3343 2147,3306 2669.01,3306 v1(2671.01,3304)
IO_99: P3.10 U1.140 | length 1893.7
  Top Layer w10: v1(2649,3273) 2674.18,3273 U1.140
  Bottom Layer w10: P3.10 1373,2785 1457,2785 1558.31,2886.31 1558.31,3217.31 1668,3327 2093,3327 2137,3283 2639,3283 v1(2649,3273)
IO_100: P3.8 U1.143 | length 1914.2
  Top Layer w10: v1(2603.66,3260) U1.143
  Bottom Layer w10: P3.8 1362,2696 1453,2696 1576,2819 1576,3197.01 1687.99,3309 2080,3309 2129,3260 v1(2603.66,3260)
IO_101: P3.6 U1.144 | length 1885.3
  Top Layer w10: P3.6 1366,2592 1435,2592 1566,2723 1566,3156 1601,3191 2644.82,3191 U1.144
NetC14_2: C14.2 R15.2 U1.110 Y1.2 | length 198.8
  Top Layer w10: Y1.2@3051.46,3727.46 3054.88,3727.46 U1.110@3133.17,3649.17
  Bottom Layer w10: C14.2 3013.84,3754.16 v1(3056,3712)
NetC15_2: C15.2 R15.1 U1.109 Y1.1 | length 297.7
  Top Layer w10: Y1.1@3140.54,3816.54 3171,3786.08 3171,3669.14 U1.109@3156.88,3655.02
  Bottom Layer w10: C15.2 3108.84,3859.16 v1(3151,3817) 3151,3777 R15.1
NetC16_2: C16.2 R17.1 U1.71 Y2.1 | length 465.4
  Top Layer w10: U1.71@3748.17,3034.17 3760.34,3022 3875,3022 3907,3054 3994,3054 v1(4001,3047)
  Top Layer w15: v1(4001,3047) 4010,3047 4030,3027 Y2.1@4056,3053
  Bottom Layer w15: R17.1@3932,3108 3932,3098 3983.79,3046.21 4015.54,3046.21 C16.2
NetC17_2: C17.2 R16.2 Y2.2 | length 271.6
  Top Layer w10: Y2.2@4024,3253 4075,3253 4107,3221 v1(4107,3153)
  Bottom Layer w15: C17.2 4079.16,3125.16 v1(4107,3153) 4134.84,3180.84 R16.2@4134.84,3195.16
NetConfig_OK_1: Config_OK.1 R14.2
  other v1: 3504,4092.63
NetJTAG_3: JTAG.3 U1.77 | length 1475.2
  Top Layer w10: U1.77 3809.82,3335 3826,3335 v1(3829,3338)
  Bottom Layer w10: JTAG.3@2895,4201 2895,4192 2945,4142 3009.44,4142 3811.44,3340 v1@3829,3340
NetJTAG_4: JTAG.4 U1.75 | length 1585.6
  Top Layer w10: U1.75 3777.5,3247 3808,3247 v1(3832,3271)
  Bottom Layer w10: JTAG.4@2795,4201 2795,4185 2871,4109 3019.82,4109 3817.82,3311 3819,3311 3832,3298 v1(3832,3271)
NetJTAG_5: JTAG.5 U1.76 | length 1635.8
  Top Layer w10: U1.76 3780.66,3278 v1(3792,3278)
  Bottom Layer w10: JTAG.5@2695,4201 2695,4151 2772,4074 3026.53,4074 3792,3308.53 v1(3792,3278)
NetJTAG_6: JTAG.6 U1.78 | length 1645.3
  Top Layer w10: U1.78 3747,3300.01 v1(3747,3311)
  Bottom Layer w10: JTAG.6@2595,4201 2595,4140 2696,4039 3027,4039 3741,3325
NetPower_1: Power.1 R18.2
  other v1: 3272,4084
NetR1_2: R1.2 U1.80 | length 113.5
  Top Layer w10: v1(3618,3229) 3620.31,3229 U1.80 U1.80@3653.42,3264.42
  Bottom Layer w10: v1(3618,3229) 3647.32,3229 R1.2
NetR2_2: R2.2 U1.70 | length 102.4
  Top Layer w10: U1.70@3736.53,3017.53 3797.06,2957 3804.06,2964 v1(3811,2964)
NetR14_1: R14.1 U1.79 | length 1224.7
  Top Layer w10: U1.79 3712,3292.85 3712,3317 3786,3391 v1(3816,3391)
  Bottom Layer w10: R14.1@3502,4187 3462,4187 3447,4172 3447,3741.28 3797.28,3391 v1(3816,3391)
NetR16_1: R16.1 R17.2 U1.72 | length 465.7
  Top Layer w10: U1.72 3769.18,3041 3864,3041 3963,3140 v1(3963,3187)
  Bottom Layer w15: v1(3963,3187) 3966,3187 3967,3188 3989.5,3165.5 4074.84,3250.84 R16.1@4079.16,3250.84
RECFG: C3.2 R3.1 ReConfig.2 U1.74 | length 1051.8
  Top Layer w10: U1.74 3772.34,3214 3817,3214 3837,3234 v1(3840,3234)
  Bottom Layer w10: R3.1@3739.37,4032 3739.37,3506.63 3862,3384 3862,3254 v1@3845,3237
  Bottom Layer w30: R3.1 C3.2
  other v1: 3784,4008
pads on no net: U2.4 U2.7 U2.10 U2.13 U2.15 U2.36 U2.40 U2.42 U2.45 U2.48 U2.51 USB_Pwr.0 USB_Pwr.2 USB_Pwr.3 USB_Pwr.4

## Polygon pours and split planes (outlines as drawn)
GND on Top Layer "GND_L01_P000" (solid, remove dead copper, pour order 0): 1218,4497.92 1218,2290 4974,2290 4974,4501.92
GND on Bottom Layer "GND_L02_P002" (solid, remove dead copper, pour order 2): 1217,4503 1217,2287 4976,2287 4976,4503

## Silkscreen, mask and mechanical layers (free items; w line width, h text height)
Top Overlay:
  text "GND" at 2463,4224 h60 r270
  text "TDO" at 2563.67,4224 h60 r270
  text "TDI" at 2664.33,4224 h60 r270
  text "TMS" at 2765,4224 h60 r270
  text "TCK" at 2865.67,4224 h60 r270
  text "VJTAG" at 2966.34,4224 h60 r270
  text "5V_In" at 3077,4224 h60 r270
  text "3v3" at 1642,3882 h60
  text "1v2" at 2020,3882 h60
  text "CME-M5" at 3044,3228 h60
Bottom Overlay:
  text "16MB SDRAM" at 2408,2994 h60
  text "MT48LC16M8A2" at 2410,2880 h60
Mechanical 1:
  the board outline again, w30

## Text inside footprints (layer, text, board x,y; h text height)
P2: Top Overlay "30" at 4869,2439 h50 r270; Top Overlay "29" at 4769,2439 h50 r270; Top Overlay "2" at 4869,3999 h50 r270; Top Overlay "1" at 4769,3999 h50 r270
P3: Top Overlay "30" at 1336,3902 h50 r90; Top Overlay "29" at 1436,3902 h50 r90; Top Overlay "2" at 1336,2342 h50 r90; Top Overlay "1" at 1436,2342 h50 r90